# Allegro board wireless_plugmeter_v2_0.brd
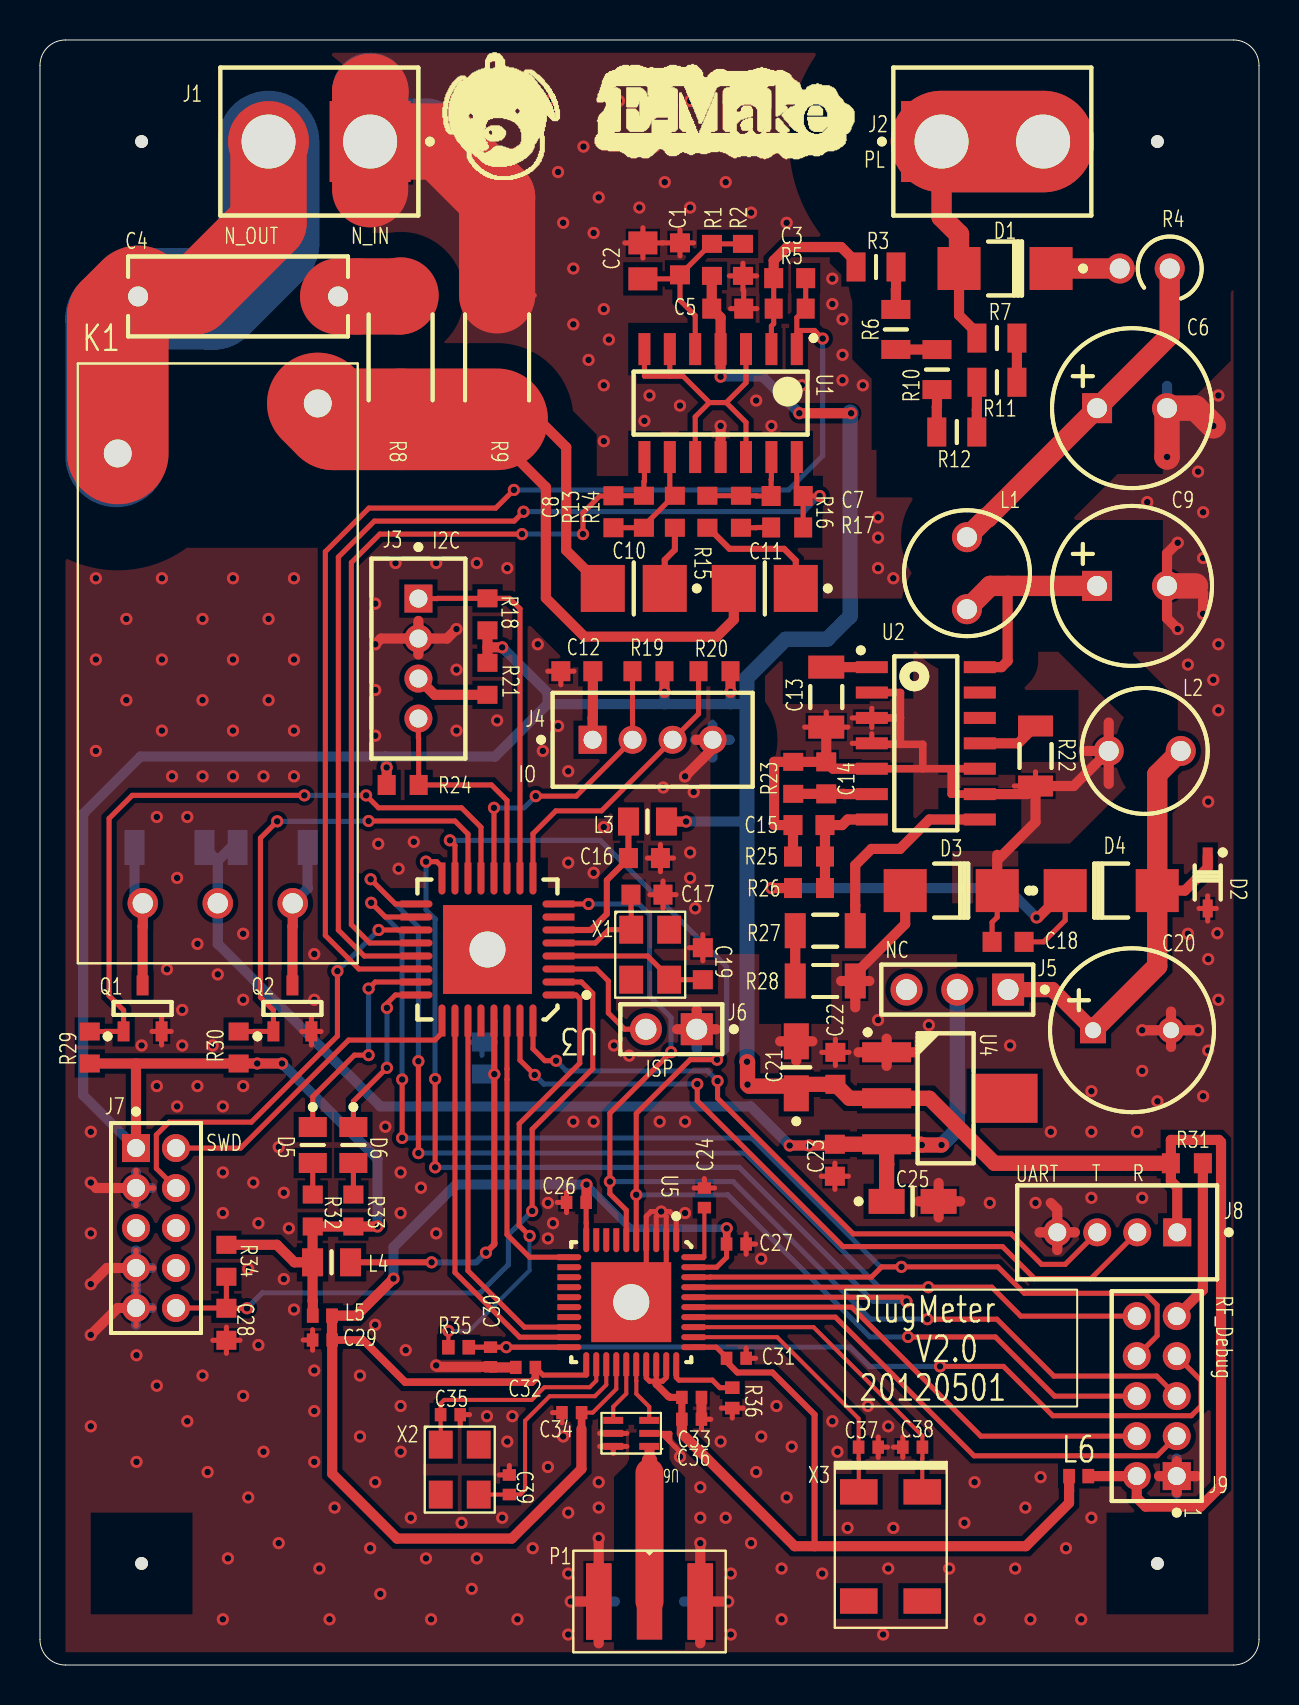
[diagram p0: board, top side]
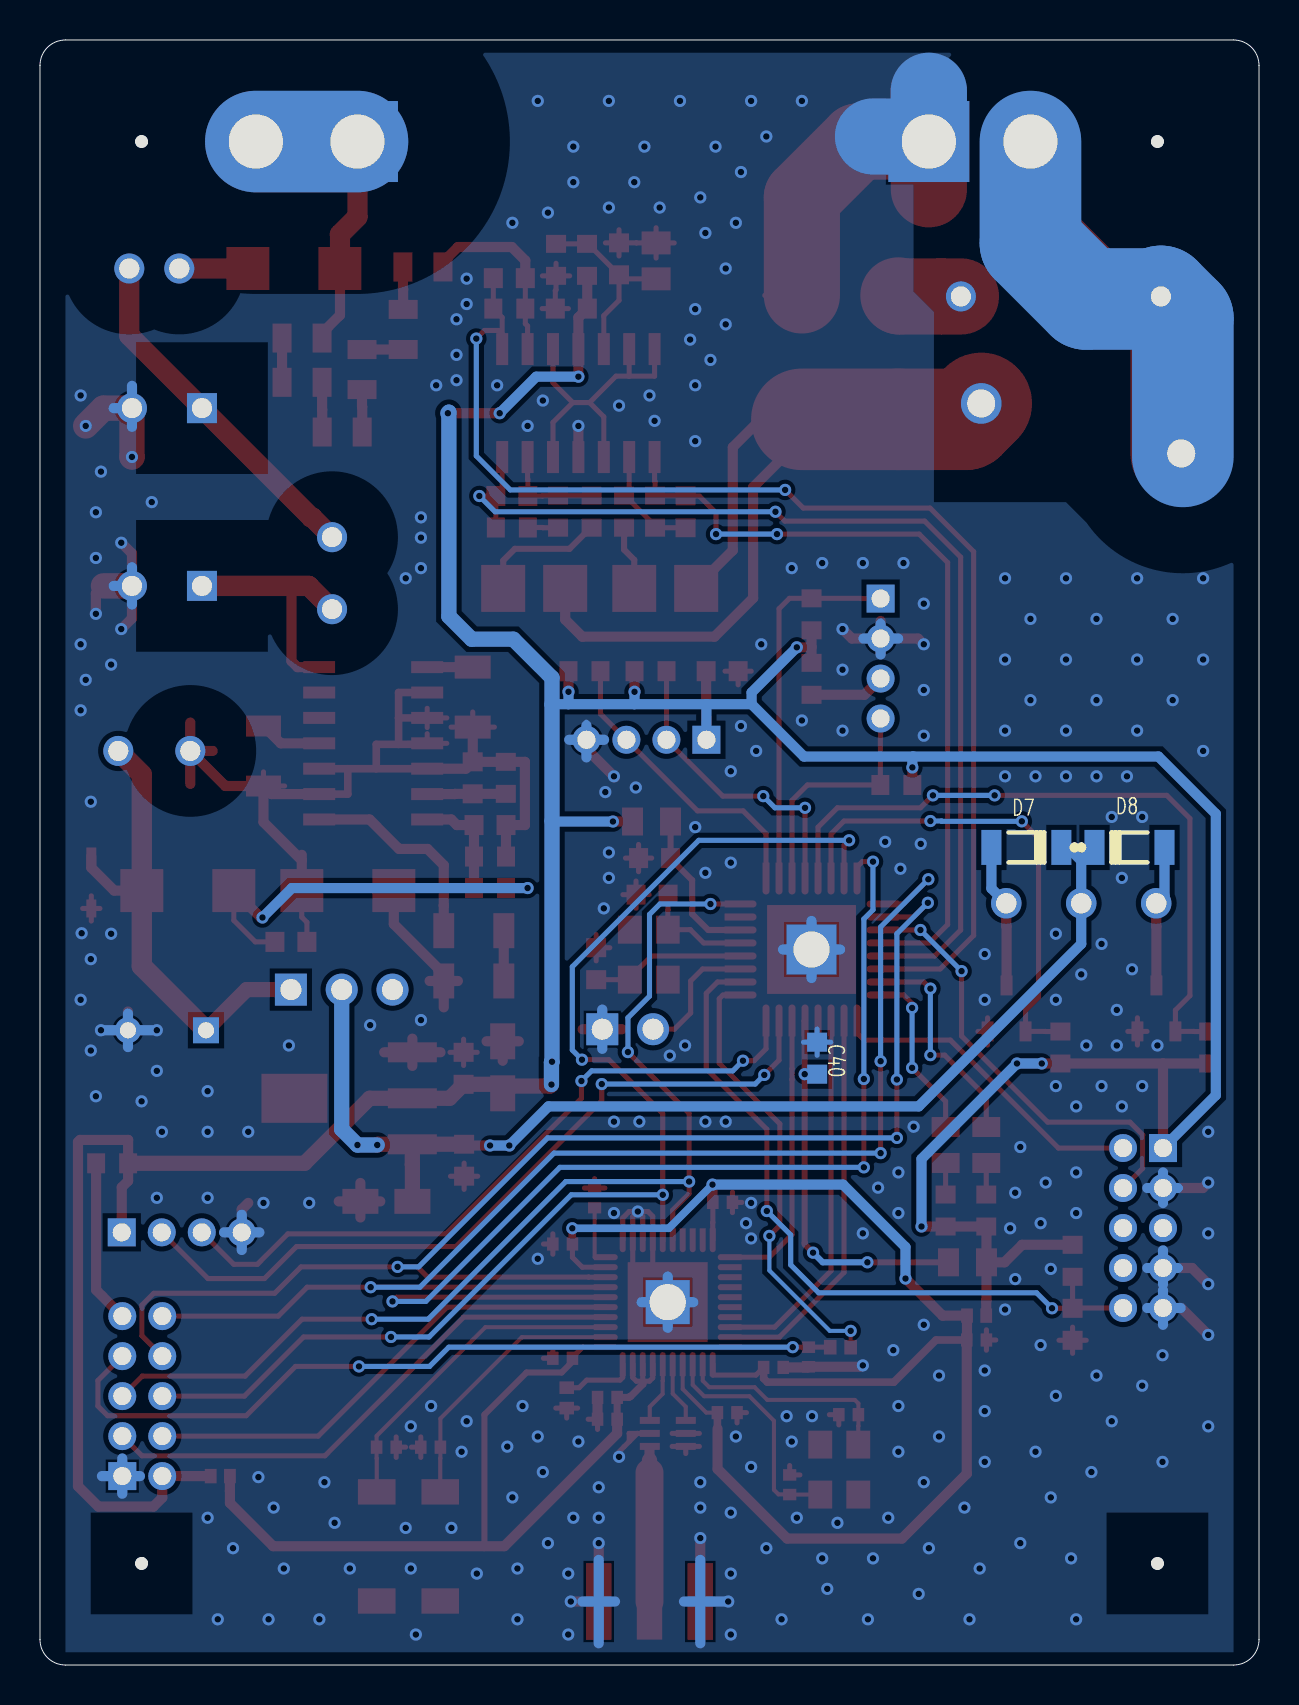
[diagram p1: board, bottom side, seen from below]

Outline 60.96 x 81.28 mm; copper layers: TOP, BOTTOM. Coordinates in mm from the lower left corner of the outline.
Outline path: 0,80.01 0,1.27 arc(0.37,0.37) 1.27,0 59.69,0 arc(60.59,0.37) 60.96,1.27 60.96,80.01 arc(60.59,80.91) 59.69,81.28 1.27,81.28 arc(0.37,80.91) 0,80.01

## Design rules (mm)
nets with their own width: min track width 0.254; nets +1V65 CC2530_DC CC2530_DD GND_POWER N110795 RF_SPI_CLK SWCLK
nets with their own width: min track width 0.508; nets +3V3 +5V

## Placement (name value [footprint] x y rotation side)
C1  C_220N_0603  [C_0603]  32 70.33 90 top
C2  C_10uU_6V3_0805  [C_0805]  30.15 70.23 90 top
C3  C_15N_0603  [C_0603]  37.49 69.37 0 top
C4  C_33N_400V_R1000  [CAP_R1000]  9.91 68.45 0 top
C5  C_220N_0603  [C_0603]  34.39 67.84 0 top
C6  C_2U2_450V_PR138  [CAPC_PR138]  54.61 62.87 0 top
C7  C_56P_0603  [C_0603]  37.36 58.47 0 top
C8  C_1N2_0603  [C_0603]  28.68 57.68 90 top
C9  C_2U2_450V_PR138  [CAPC_PR138]  54.61 53.98 0 top
C10  C_47U_10V_3538M  [CAPMP_3528M]  29.69 53.85 180 top
C11  C_47U_10V_3538M  [CAPMP_3528M]  36.25 53.85 180 top
C12  C_100N_0603  [C_0603]  26.85 49.71 180 top
C13  C_220N_50V_1206  [C_1206]  39.32 48.41 270 top
C14  C_330P_0603  [C_0603]  39.32 44.37 90 top
C15  C_5N6_50V_0603  [C_0603]  38.46 42.01 180 top
C16  C_220N_0603  [C_0603]  30.23 40.36 0 top
C17  C_12P_0603  [C_0603]  30.35 38.53 0 top
C18  C_100N_16V_0603  [C_0603]  48.41 36.17 180 top
C19  C_12P_0603  [C_0603]  33.15 35.08 90 top
C20  C_470U_6V3_PR390  [CAPC_PR390]  54.61 31.75 0 top
C21  C_10U_3216A  [CAPMP_3216A]  37.82 29.9 90 top
C22  C_220N_0603  [C_0603]  39.78 29.84 90 top
C23  C_220N_0603  [C_0603]  39.75 25.25 270 top
C24  C_1U_0402_X5R_K_6P3  [C_0402]  33.22 23.37 90 top
C25  C_10U_3216A  [CAPMP_3216A]  43.64 23.19 0 top
C26  C_100N_0402_X5R_K_10  [C_0402]  26.82 23.14 180 top
C27  C_1U_0402_X5R_K_6P3  [C_0402]  34.82 21.06 0 top
C28  C_220N_0603  [C_0603]  9.32 17.04 270 top
C29  C_2U2_0402_X5R_M_4VDC  [C_0402]  14.12 16.26 180 top
C30  C_1N_0402_NP0_J_50  [C_0402]  22.53 15.41 270 top
C31  C_100N_0402_X5R_K_10  [C_0402]  34.82 15.34 0 top
C32  C_100N_0402_X5R_K_10  [C_0402]  24.28 14.88 180 top
C33  C_100N_0402_X5R_K_10  [C_0402]  32.59 13.39 0 top
C34  C_100N_0402_X5R_K_10  [C_0402]  26.59 12.62 180 top
C35  C_27P_0402_NP0_J_50  [C_0402]  20.52 12.52 0 top
C36  C_220P_0402_NP0_J_50  [C_0402]  32.59 12.29 0 top
C37  C_15P_0402_NP0_J_50  [C_0402]  41.43 10.9 0 top
C38  C_15P_0402_NP0_J_50  [C_0402]  43.64 10.9 180 top
C39  C_27P_0402_NP0_J_50  [C_0402]  23.47 9.02 90 top
C40  C_220N_0603  [C_0603]  22.1 30.35 90 bottom
D1  D_S1M_SMA  [DO-214AC]  48.26 69.85 180 top
D2  BZX384C5V6  [SOD-323]  58.39 39.14 270 top
D3  D_FR1J_SMA  [DO-214AC]  45.57 38.73 180 top
D4  D_FR1J_SMA  [DO-214AC]  53.57 38.73 0 top
D5  LED_RED_0805  [LEDC_0805]  13.64 26.01 270 top
D6  LED_RED_0805  [LEDC_0805]  15.67 26.01 270 top
D7  D_1N4148_SOD80C  [SOD-80C]  11.63 40.89 0 bottom
D8  D_1N4148_SOD80C  [SOD-80C]  6.48 40.89 180 bottom
J1  NEUTRAL  [HDRV2_200]  16.51 76.2 180 top
J2  LIVE  [HDRV2_200]  45.09 76.2 0 top
J3  I2C  [HDRV4P200_1X4]  18.92 53.34 270 top
J4  I/O  [HDRV4P200_1X4]  27.64 46.28 0 top
J5  POWER_SEL  [HDRV3_100]  48.41 33.78 180 top
J6  ISP  [HDRV2_100]  32.84 31.8 180 top
J7  SWD  [HDRV10P200_2X5]  4.8 25.86 270 top
J8  UART  [HDRV4P200_1X4]  56.87 21.64 180 top
J9  RF_DEBUG  [HDRV10P200_2X5]  56.85 9.45 90 top
K1  HFE20-3/5-1HST-L2  [HFE20-3]  8.89 38.1 0 top
L1  L_1mH_22R105C  [IND_R360]  46.35 54.61 270 top
L2  L_1mH_22R105C  [IND_R360]  55.24 45.72 0 top
L3  600 Ohm 100MHz  [L_0805]  30.38 42.19 180 top
L4  600 Ohm 100MHz  [L_0805]  14.58 20.14 0 top
L5  L_BEAD_102_0402  [INDC_0402]  14.12 17.48 180 top
L6  L_BEAD_102_0402  [INDC_0402]  51.94 9.45 0 top
NOREF  -  []  -27.94 -73.66 0 top
NOREF#2  -  [unnamed#2]  55.88 76.2 0 top
NOREF#3  -  []  0 0 90 top
NOREF#4  -  []  0 0 0 top
NOREF#5  -  [unnamed#2]  55.88 5.08 0 top
NOREF#6  -  [unnamed#2]  5.08 76.2 0 top
NOREF#7  -  [unnamed#2]  5.08 5.08 0 top
P1  SMA_SIDE  [SMA_SMD_SIDE]  30.48 3.17 270 top
Q1  2N7002/SOT  [SOT-23]  5.13 32.84 90 top
Q2  2N7002/SOT  [SOT-23]  12.62 32.84 90 top
R1  R_22K_0603  [R_0603]  33.6 70.28 90 top
R2  R_22K_0603  [R_0603]  35.15 70.28 270 top
R3  R_270K_0805  [R_0805]  41.81 69.93 180 top
R4  R_220R_PTH  [R_ADV250]  55.24 69.85 0 top
R5  R_5K6_0603  [R_0603]  37.49 67.84 0 top
R6  R_270K_0805  [R_0805]  42.8 66.8 90 top
R7  R_270K_0805  [R_0805]  47.85 66.37 0 top
R8  R_100R_5%_2W_2512  [R_2512]  18.03 65.41 270 top
R9  R_5m_1%_2W_2512  [R_2512]  22.86 65.41 270 top
R10  R_270K_0805  [R_0805]  44.86 64.8 90 top
R11  R_270K_0805  [R_0805]  47.85 64.16 180 top
R12  R_270K_0805  [R_0805]  45.85 61.67 180 top
R13  R_68K_0603  [R_0603]  30.2 57.68 90 top
R14  R_4K7_0603  [R_0603]  31.75 57.68 90 top
R15  R_5K6_0603  [R_0603]  33.38 57.68 90 top
R16  R_1M2_0603  [R_0603]  35.05 57.68 270 top
R17  R_100K_0603  [R_0603]  37.36 56.9 0 top
R18  R_10K_0603  [R_0603]  22.38 52.55 90 top
R19  R_10K_0603  [R_0603]  30.43 49.71 180 top
R20  R_10K_0603  [R_0603]  33.73 49.71 180 top
R21  R_0R_0603  [R_0603]  22.38 49.33 270 top
R22  R_2R2_1206  [R_1206]  49.78 45.47 270 top
R23  R_7K5_0603  [R_0603]  37.67 44.37 90 top
R24  R_10K_0603  [R_0603]  18.14 44.02 0 top
R25  R_5K6_0603  [R_0603]  38.46 40.44 180 top
R26  R_5K1_0603  [R_0603]  38.46 38.86 0 top
R27  R_200K_1206  [R_1206]  39.27 36.73 180 top
R28  R_200K_1206  [R_1206]  39.27 34.21 0 top
R29  R_10K_0603  [R_0603]  2.49 30.89 270 top
R30  R_10K_0603  [R_0603]  9.93 30.89 270 top
R31  R_0R_0603  [R_0603]  57.35 25.1 180 top
R32  R_3K9_0603  [R_0603]  13.64 22.73 270 top
R33  R_3K9_0603  [R_0603]  15.67 22.73 270 top
R34  R_47K_0603  [R_0603]  9.32 20.22 270 top
R35  R_2K2_0402_G  [R_0402]  20.93 15.9 180 top
R36  R_56K_0402_F  [R_0402]  34.62 13.36 270 top
U1  NE5234D  [SO14]  34.04 63.12 270 top
U2  TEA152XT  [SO14]  44.3 46.1 0 top
U3  EM773FHN33  [HVQFN33M]  22.38 35.79 180 top
U4  AMS1117-3V3  [SOT-223M]  45.29 28.35 0 top
U5  CC2530  [S-PVQFN-M40]  29.57 18.15 270 top
U6  -  [2450BM15A0002]  30.47 10.93 180 top
X1  12MHz  [XTAL_SMD_3_2X2_5]  29.57 36.78 270 top
X2  X_32.000/10/15/30/16  [XTAL_SMD_3_2X2_5]  20.04 11.02 270 top
X3  X_32.768/20/50/40/12  [XTAL_SMD_85SMX]  40.94 8.66 0 top

## Library data of the parts
C1-C3 C5 C7 C8 = CAP NP: room: OPAMP
C4 = CAP NP: room: AC_RELAY
C6 C9 C20 C21 C25 = CAP POL: room: POWER
C10 C11 = CAP POL: room: OPAMP
C12 = CAP NP: room: EX_HEADER
C13-C15 C18 C22 C23 = CAP NP: room: POWER
C16 C17 C19 C40 = CAP NP: room: MCU
C24 C26 C27 C29-C39 = CAP NP
C28 = CAP NP: room: SWD
D1 D3 D4 = DIODE: room: POWER
D2 = DIODE BREAKDOWN: room: POWER
D5 D6 = LED: room: MCU
D7 D8 = DIODE: room: AC_RELAY
J1 J2 = HEADER 2
J3 = HEADER 4: room: MCU
J4 J8 = HEADER 4: room: EX_HEADER
J5 = HEADER 3: room: POWER
J6 = JUMPER
J7 J9 = HEADER 5X2
K1 = HFE20-3/5-1HST-L2
L1 L2 = INDUCTOR: room: POWER
L3 L4 = INDUCTOR: room: MCU
L5 L6 = INDUCTOR
P1 = SMA_SIDE
Q1 Q2 = 2N7002/SOT: room: AC_RELAY
R1 R2 R5 R13-R17 = R2: room: OPAMP
R3 R4 R6 R7 R10-R12 R22 R23 R25-R28 = R2: room: POWER
R8 R9 = R2: room: AC_RELAY
R18 R21 R24 R29 R30 R32 R33 = R2: room: MCU
R19 R20 = R2: room: EX_HEADER
R31 = R2: room: RF_DEBUG
R34 = R2: room: SWD
R35 R36 = R2
U1 = NE5234: room: OPAMP
U2 = TEA152XT: room: POWER
U3 = EM773FHN33: room: MCU
U4 = AMS1117-FIX: room: POWER
U5 = CC2530
U6 = 2450BM15A0002
X1 X2 = OSC_0
X3 = OSC_32.768K

## Footprints (pads in the part's own frame, mm; a bottom-side part is the same pattern mirrored in y, then rotated)
2450BM15A0002
  rect 1.001x0.351 smd: 1(0,0) 2(0,-0.65) 3(0,-1.3) 4(1.801,-1.3) 5(1.801,-0.65) 6(1.801,0)
C_0402
  rect 0.579x0.66 smd: 1(-0.49,0) 2(0.49,0)
C_0603
  rect 0.95x1.001 smd: 1(-0.8,0) 2(0.8,0)
C_0805
  rect 1.151x1.45 smd: 1(-0.899,0) 2(0.899,0)
C_1206
  rect 1.151x1.801 smd: 1(-1.501,0) 2(1.501,0)
CAP_R1000
  round 1.501 hole 1.001: 1(-5.001,0) 2(5.001,0)
CAPC_PR138
  rect 1.501x1.501 hole 1.001: 1(-1.75,0)
  round 1.501 hole 1.001: 2(1.75,0)
CAPC_PR390
  rect 1.3x1.3 hole 0.8: 1(-1.951,0)
  round 1.3 hole 0.8: 2(1.951,0)
CAPMP_3216A
  rect 1.801x1.25 smd: 1(-1.3,0) 2(1.3,0)
CAPMP_3528M
  rect 2.2x2.349 smd: 1(-1.549,0) 2(1.549,0)
DO-214AC
  rect 2.149x2.149 smd: A(2.301,0) C(-2.301,0)
HDRV2_100
  rect 1.6x1.6 hole 1.049: 1(0,0)
  round 1.6 hole 1.049: 2(2.54,0)
HDRV2_200
  rect 4.049x4.049 hole 2.7: 1(0,0)
  round 4.049 hole 2.7: 2(5.08,0)
HDRV3_100
  rect 1.6x1.6 hole 1.049: 1(0,0)
  round 1.6 hole 1.049: 2(2.54,0) 3(5.08,0)
HDRV4P200_1X4
  rect 1.4x1.4 hole 0.899: 1(0,0)
  round 1.4 hole 0.899: 2(1.999,0) 3(4,0) 4(5.999,0)
HDRV10P200_2X5
  rect 1.4x1.4 hole 0.899: 1(0,0)
  round 1.4 hole 0.899: 2(0,1.999) 3(1.999,0) 4(1.999,1.999) 5(4,0) 6(4,1.999) 7(5.999,0) 8(5.999,1.999) 9(8.001,0) 10(8.001,1.999)
HFE20-3
  round 1.524 hole 1.016: 1(3.749,0) 2(-3.749,0) 5(0,0)
  round 2.032 hole 1.397: 3(-5.001,22.499) 4(5.001,25.001)
HVQFN33M
  custom 1.6x0.351 smd: 1(-3.551,2.276) 2(-3.551,1.626) 3(-3.551,0.975) 4(-3.551,0.325) 5(-3.551,-0.325) 6(-3.551,-0.975) 7(-3.551,-1.626) 8(-3.551,-2.276) 17(3.551,-2.276) 18(3.551,-1.626) 19(3.551,-0.975) 20(3.551,-0.325) 21(3.551,0.325) 22(3.551,0.975) 23(3.551,1.626) 24(3.551,2.276)
  custom 0.351x1.6 smd: 9(-2.276,-3.551) 10(-1.626,-3.551) 11(-0.975,-3.551) 12(-0.325,-3.551) 13(0.325,-3.551) 14(0.975,-3.551) 15(1.626,-3.551) 16(2.276,-3.551) 25(2.276,3.551) 26(1.626,3.551) 27(0.975,3.551) 28(0.325,3.551) 29(-0.325,3.551) 30(-0.975,3.551) 31(-1.626,3.551) 32(-2.276,3.551)
  rect 4.445x4.445 hole 1.801: 33(0,0)
IND_R360
  round 1.501 hole 1.001: 1(-1.801,0) 2(1.801,0)
INDC_0402
  rect 0.589x0.719 smd: 1(-0.48,0) 2(0.48,0)
L_0805
  rect 1.049x1.4 smd: 1(-0.95,0) 2(0.95,0)
LEDC_0805
  rect 1.001x1.4 smd: A(0.899,0) C(-0.899,0)
R_0402
  rect 0.63x0.729 smd: 1(-0.511,0) 2(0.511,0)
R_0603
  rect 0.899x1.001 smd: 1(-0.8,0) 2(0.8,0)
R_0805
  rect 0.95x1.45 smd: 1(-1.001,0) 2(1.001,0)
R_1206
  rect 1.049x1.75 smd: 1(-1.501,0) 2(1.501,0)
R_2512
  rect 1.151x3.35 smd: 1(-3.099,0) 2(3.099,0)
R_ADV250
  round 1.501 hole 1.001: 1(-1.25,0) 2(1.25,0)
S-PVQFN-M40
  custom 1.199x0.3 smd: 1(-3.099,2.25) 2(-3.099,1.75) 3(-3.099,1.25) 4(-3.099,0.749) 5(-3.099,0.249) 6(-3.099,-0.249) 7(-3.099,-0.749) 8(-3.099,-1.25) 9(-3.099,-1.75) 10(-3.099,-2.25) 21(3.099,-2.25) 22(3.099,-1.75) 23(3.099,-1.25) 24(3.099,-0.749) 25(3.099,-0.249) 26(3.099,0.249) 27(3.099,0.749) 28(3.099,1.25) 29(3.099,1.75) 30(3.099,2.25)
  custom 0.3x1.199 smd: 11(-2.25,-3.099) 12(-1.75,-3.099) 13(-1.25,-3.099) 14(-0.749,-3.099) 15(-0.249,-3.099) 16(0.249,-3.099) 17(0.749,-3.099) 18(1.25,-3.099) 19(1.75,-3.099) 20(2.25,-3.099) 31(2.25,3.099) 32(1.75,3.099) 33(1.25,3.099) 34(0.749,3.099) 35(0.249,3.099) 36(-0.249,3.099) 37(-0.749,3.099) 38(-1.25,3.099) 39(-1.75,3.099) 40(-2.25,3.099)
  rect 4x4 hole 1.801: 41(0,0)
SMA_SMD_SIDE
  rect 3.81x1.27 smd: 1(0,0) 2(0,2.54) 3(0,2.54) 4(0,-2.54) 5(0,-2.54)
SO14
  rect 1.6x0.599 smd: 1(-2.7,3.81) 2(-2.7,2.54) 3(-2.7,1.27) 4(-2.7,0) 5(-2.7,-1.27) 6(-2.7,-2.54) 7(-2.7,-3.81) 8(2.7,-3.81) 9(2.7,-2.54) 10(2.7,-1.27) 11(2.7,0) 12(2.7,1.27) 13(2.7,2.54) 14(2.7,3.81)
SOD-80C
  rect 1.001x1.75 smd: A(1.75,0) C(-1.75,0)
SOD-323
  rect 0.899x0.5 smd: A(1.3,0) C(-1.3,0)
SOT-23
  rect 1.001x0.599 smd: 1(-1.151,0.95) 2(-1.151,-0.95) 3(1.151,0)
SOT-223M
  rect 2.451x1.001 smd: 1(-2.949,2.301) 2(-2.949,0) 3(-2.949,-2.301)
  rect 3.299x2.451 smd: 4(2.949,0)
unnamed#2
  round 0.635 hole 3.175 unplated: (0,0)
XTAL_SMD_3_2X2_5
  rect 1.397x1.194 smd: 1(0,0) 2(2.499,0) 3(2.499,1.9) 4(0,1.9)
XTAL_SMD_85SMX
  rect 1.88x1.27 smd: 1(0,0) 2(0,-5.461) 3(3.175,-5.461) 4(3.175,0)

## Nets
+1V65: C1.1 C2.1 R1.2 R2.1 U1.5(+IN)
+3V3: C5.1 C12.1 C21.1 C22.1 J4.1 J7.1 J8.1 J9.2 L3.1 L4.1 L5.2 L6.2 R1.1 R18.1 R19.1 R20.1 R21.1 R24.1 R29.2 R30.2 R31.2 R32.2 R33.2 R34.1 U1.4(VCC) U4.2(VOUT)
+5V: C23.1 C25.1 D7.C(K) D8.C(K) J5.2 K1.5(+) U4.3(VIN)
+5V_EXT: J5.3
GND_POWER: C1.2 C2.2 C5.2 C6.2 C9.2 C12.2 C16.2 C17.2 C19.2 C20.2 C21.2 C22.2 C23.2 C24.2 C25.2 C26.2 C27.2 C28.2 C29.2 C30.2 C31.2 C32.2 C33.2 C34.2 C35.2 C36.2 C37.2 C38.2 C39.2 C40.2 D2.A(ANODE) D3.A J1.1 J3.2 J4.4 J6.1 J7.3 J7.7 J7.9 J8.4 J9.1 P1.2(SHIELD#2) P1.3(SHIELD#3) P1.4(SHIELD#4) P1.5(SHIELD#5) Q1.2(SOURCE) Q2.2(SOURCE) R2.2 R9.1 R28.2 R36.2 U1.11(GND) U3.33(VSS) U4.1(GND) U5.1(DGND_USB) U5.2(USB_M) U5.3(USB_P) U5.4(DVDD_USB) U5.41(GND) U6.2(GND#2) U6.5(GND#5) U6.6(GND#6)
2: X1.2 X2.2 X3.2
3: X3.3
4: X1.4 X2.4
CC2530_DC: J9.3 U5.34(P2_2)
CC2530_DD: J9.4 U5.35(P2_1)
CC2530_RESET: R35.2 U3.1(PIO2_0/D\T\R\)
CFG0: U3.26(PIO1_4/CT32B1_MAT3/WAKEUP) U5.19(P0_0)
CFG1: U3.27(PIO1_11) U5.18(P0_1)
I_HIGHGAIN: C7.2 R17.2 U1.14(OUT) U3.21(I_HIGHGAIN)
I_LOWGAIN: C8.2 R13.2 U1.8(OUT) U3.20(I_LOWGAIN)
MRDY: U3.16(PIO0_7/C\T\S\) U5.36(P2_0)
N_OUTX: C4.1 J1.2 K1.3(P2)
OPAMPREF: U1.3(+IN) U1.6(-IN) U1.7(OUT) U1.10(+IN) U1.12(+IN)
PIO0_3: J4.3 R20.2 U3.9(PIO0_3)
PIO1_9: J4.2 R19.2 U3.12(PIO1_9)
PLUG_OFF: Q1.1(GATE) R29.1 U3.13(PIO3_4)
PLUG_ON: Q2.1(GATE) R30.1 U3.14(PIO3_5)
RF_SPI_CLK: J9.6 U3.15(PIO0_6/SCK0) U5.5(P1_5)
RF_SPI_CSN: J9.5 U3.8(PIO0_2/SSEL0/CT16B0_CAP0) U5.6(P1_4)
RF_SPI_MISO: J9.10 U3.17(PIO0_8/MISO0/CT16B0_MAT0) U5.37(P1_7)
RF_SPI_MOSI: J9.8 U3.18(PIO0_9/MOSI0/CT16B0_MAT1) U5.38(P1_6)
RST: C28.1 J7.10 R34.2 U3.2(R\E\S\E\T\/PIO0_0)
SCL: J3.1 R18.2 U3.10(PIO0_4/SCL)
SDA: J3.4 R24.2 U3.11(PIO0_5/SDA)
SRDY: U3.30(PIO1_5/R\T\S\/CT32B0_CAP0) U5.11(P1_0)
SWCLK: J7.4 U3.19(SWCLK/PIO0_10/SCK0/CT16B0_MAT2)
SWDIO: J7.2 U3.25(SWDIO/PIO1_3/CT32B1_MAT2)
UART_RX: J8.2 U3.31(PIO1_6/RXD/CT32B0_MAT0)
UART_TX: J8.3 U3.32(PIO1_7/TXD/CT32B0_MAT1)
VOLTAGE: C3.2 R5.2 U1.1(OUT) U3.22(VOLTAGE)
N79212: C26.1 C27.1 C29.1 C32.1 C34.1 L5.1 U5.10(DVDD) U5.21(AVDD5/AVDD_SOC) U5.24(AVDD3) U5.39(AVDD_DREG)
N79308: C31.1 C33.1 C36.1 L6.1 U5.27(AVDD2) U5.28(AVDD1) U5.29(AVDD4) U5.31(AVDD_GUARD)
N79444: U5.25(RF_P) U6.4(BAL2)
N79456: U5.26(RF_N) U6.3(BAL1)
N79468: P1.1(CENTER) U6.1(UNBAL)
N79766: R36.1 U5.30(RBIAS)
N79774: C24.1 U5.40(DCOUPL)
N80192: C39.1 U5.23(XOSC32M_Q2) X2.3
N80214: C35.1 U5.22(XOSC32M_Q1) X2.1
N80242: C38.1 U5.33(P2_3) X3.4
N80254: C37.1 U5.32(P2_4) X3.1
N80434: J9.9 R31.1
N80816: C30.1 J9.7 R35.1 U5.20(RESET_N)
N110687: D1.A J2.1 J2.2 R7.1
N110723: D1.C(K) R4.1
N110727: C6.1 L1.1 R4.2
N110775: C9.1 L1.2 U2.14(DRAIN)
N110783: R22.1 U2.11(SOURCE)
N110791: R27.1 U2.8(AUX)
N110795: C13.2 C14.2 C15.2 C18.2 D3.C(K) L2.1 R22.2 R23.2 R25.2 U2.2(GND#2) U2.3(GND#3) U2.4(GND#4) U2.5(GND#5) U2.9(GND#9) U2.10(GND#10)
N110827: C14.1 R23.1 U2.6(RC)
N110863: C13.1 U2.1(VCC)
N110911: C15.1 R25.1 R26.2 U2.7(REG)
N110951: C18.1 D4.C(K) R26.1
N111127: C20.1 D2.C(CATHODE) D4.A J5.1 L2.2
N112069: C3.1 R3.2 R5.1 U1.2(-IN)
N112191: D7.A K1.1(C1) Q2.3(DRAIN)
N112243: D8.A K1.2(C2) Q1.3(DRAIN)
N112413: C8.1 R13.1 R14.2 U1.9(-IN)
N112505: C7.1 R15.2 R16.1 U1.13(-IN)
N112735: C16.1 L3.2 U3.6(VDD_IO)
N112759: C10.2 C11.2 K1.4(P1) R8.2 R9.2
N112795: C10.1 R14.1
N112799: C11.1 R15.1
N112873: C19.1 U3.4(XTALIN) X1.3
N112983: C4.2 R8.1
N113301: C17.1 U3.5(XTALOUT) X1.1
N113357: C40.1 L4.2 U3.29(VDD_3V3)
N134846: J3.3 R21.2
N156238: D5.C(CATHODE) U3.23(R/PIO1_1/CT32B1_MAT0)
N156337: D6.C(CATHODE) U3.24(R/PIO1_2/CT32B1_MAT1)
N1176921: R7.2 R11.1
N1177441: R16.2 R17.1
N1180960: D5.A(ANODE) R32.1
N1183960: R3.1 R6.2
N1186440: R27.2 R28.1
N1190960: R11.2 R12.1
N1190961: R10.1 R12.2
N1192944: J6.2 U3.3(PIO0_1/CLKOUT/CT32B0_MAT2)
N1193960: R6.1 R10.2
N1563090: D6.A(ANODE) R33.1

Pads without a net: J7 5 6 8; U2 12 13; U3 7 28; U4 4; U5 7 8 9 12 13 14 15 16 17

## Via types
v1: diameter 0.61, hole 0.33, TOP to BOTTOM, 342 vias

## Routing (per net, layer and track width the routed paths; a pad name or vN(x,y) marks a point on that pad's centre or on a via; arc(x,y) is an arc through that point)
+1V65: length 9.8
  TOP w0.254: C1.1 32,68.26 32.77,67.5 U1.5 ; C1.1 31.8,69.33 C2.1 ; C1.1 33.55,71.08 R1.2 R2.1
+3V3: length 217.8
  TOP w0.508: R18.1 22.38,50.9 ; 22.38,50.9 v1(23.11,50.9) ; 22.38,50.9 R21.1 ; R34.1 11.85,21.02 12.72,20.14 L4.1 ; R20.1 v1(34.53,48.68) ; 4.8,30.09 R30.2 v1(10.86,30.09) v1(12.1,30.09) ; 4.8,30.09 R29.2 ; 4.8,30.09 J7.1 ; R1.1 33.59,69.47 C5.1 34.04,67.4 U1.4 v1(34.04,64.44) ; L6.2 J9.2 54.85,8.37 55.29,7.92 58.04,7.92 59.06,8.95 59.06,26.16 58.95,26.26 56.55,26.26 R31.2 56.55,24.21 56.87,23.9 J8.1 ; L5.2 13.64,18.22 13.63,18.23 L4.1 ; C12.1 27.65,47.37 27.64,47.36 J4.1 ; v1(16.88,21.93) R33.2 R32.2 13.63,21.92 L4.1 ; R24.1 v1(17.34,44.89) ; R19.1 v1(31.23,48.68) ; L3.1 v1(32.31,42.19) ; v1(37.97,62.61) v1(40.56,62.61)
  TOP w0.762: v1(35.36,30.18) 35.38,30.15 v1(35.38,29.03) 35.46,28.96 37.46,28.96 C21.1 38.27,29.04 C22.1 40.47,28.35 U4.2 44.48,28.35 47.73,25.1 R31.2
  BOTTOM w0.508: 34.54,48.06 31.24,48.06 ; 34.54,48.06 35.36,48.06 ; 34.54,48.06 34.53,48.07 v1(34.53,48.68) ; 31.24,48.06 27.64,48.06 ; 31.24,48.06 31.23,48.07 v1(31.23,48.68) ; 35.36,42.21 35.33,42.19 v1(32.31,42.19) ; v1(34.04,64.44) 36.14,64.44 v1(37.97,62.61) ; 27.64,48.06 J4.1 ; 27.64,48.06 25.37,48.06 ; J7.1 2.16,28.5 2.16,42.57 5.03,45.44 17.3,45.44 ; 17.3,45.44 22.76,45.44 25.37,48.06 ; 17.3,45.44 17.34,45.4 v1(17.34,44.89) ; 25.37,48.06 25.37,48.64 v1(23.11,50.9) ; v1(16.88,21.93) 16.88,25.31 v1(12.1,30.09) v1(10.86,30.09)
  BOTTOM w0.762: v1(40.56,62.61) 40.51,62.66 40.51,52.45 39.37,51.31 37.29,51.31 35.36,49.38 v1(35.36,30.18) 35.38,30.15 v1(35.38,29.03)
+5V: length 59.7
  TOP w0.508: C23.1 39.69,25.98 v1(38.46,25.98) v1(37.49,25.98)
  TOP w0.762: v1(45.09,26.01) v1(44.09,26.01) 44.06,26.05 U4.3 ; U4.3 42.34,26.05 C23.1 ; U4.3 42.34,25.04 42.34,25.03 C25.1 ; U4.3 42.35,26.04
  BOTTOM w0.508: 8.89,40.23 D8.C ; 8.89,40.23 K1.5 8.89,36.07 17.02,27.94 35.53,27.94 v1(37.49,25.98) v1(38.46,25.98) ; 8.89,40.23 9.55,40.89 D7.C
  BOTTOM w0.762: v1(44.09,26.01) v1(45.09,26.01) 45.87,26.8 J5.2
GND_POWER: length 250.6
  TOP w0.254: C24.2 33.22,24.33 ; C24.2 33.73,23.86 ; C24.2 32.71,23.86 ; 56.85,8.57 56.85,8.64 ; C16.2 31.03,41.04 ; C16.2 30.37,40.36 ; C16.2 31.03,39.68 ; C16.2 31.68,40.36 ; C29.2 13.63,16.77 ; C29.2 13.16,16.26 ; C29.2 13.63,15.75 ; C1.2 32.68,71.13 ; C1.2 31.13,71.13 31.13,71.13 C2.2 ; C1.2 32,70.48 ; C1.2 32,71.79 ; J7.9 5.68,17.86 ; J7.9 4.8,16.97 ; J7.9 4.8,18.74 ; 57.96,37.84 D2.A ; D2.A 58.83,37.84 ; D2.A 58.39,37.21 ; D2.A 58.39,38.47 ; 31.09,11.58 31.5,11.18 ; 31.09,11.58 31.49,11.58 31.5,11.58 31.5,11.18 ; 31.09,11.58 U6.2 ; 31.5,11.18 32.13,10.54 v1(32,10.41) ; Q2.2 14.05,31.69 ; Q2.2 13.57,31.01 ; Q2.2 13.57,32.37 ; Q2.2 13.09,31.69 ; R2.2 35.15,70.11 ; R2.2 35.15,68.78 35.19,68.74 C5.2 ; R2.2 34.47,69.48 ; R2.2 35.83,69.48 ; 21.48,12.52 C35.2 21.01,12.01 ; C22.2 39.78,31.3 ; C22.2 39.78,29.99 ; C22.2 40.46,30.65 ; C22.2 39.1,30.65 ; C19.2 33.15,36.53 ; C19.2 33.15,35.22 ; C19.2 32.47,35.88 ; J7.3 5.68,23.86 ; J7.3 4.8,22.98 ; J7.3 4.8,24.74 ; 26.33,22.63 C26.2 ; C26.2 26.33,23.65 ; C26.2 25.86,23.14 ; 30.32,18.9 U5.4 30.32,22.44 30.56,22.68 v1(31.06,22.68) ; 30.32,18.9 U5.41 ; 30.32,18.9 31.32,19.9 U5.2 31.32,22.43 v1(31.06,22.68) ; C38.2 43.15,11.41 ; C38.2 43.15,10.39 ; C38.2 42.68,10.9 ; 41.92,10.39 C37.2 ; C37.2 42.39,10.9 ; C37.2 41.92,11.41 ; v1(31.06,22.68) 30.82,22.44 U5.3 ; v1(31.06,22.68) 31.5,22.68 31.82,22.36 U5.1 ; 35.78,15.34 C31.2 35.31,15.85 ; 37.82,30.11 37.82,30.23 ; C17.2 31.15,39.21 ; C17.2 31.15,37.85 ; C17.2 31.81,38.53 ; C17.2 30.5,38.53 ; 25.63,12.62 C34.2 26.1,12.11 ; 26.05,49.03 C12.2 ; C12.2 25.39,49.71 ; C12.2 26.7,49.71 ; 27.99,10.93 U6.6 ; U6.6 29.35,10.93 ; U6.6 28.67,10.58 ; C28.2 10,16.24 ; C28.2 8.64,16.24 ; C28.2 9.32,16.9 ; C28.2 9.32,15.59 ; C2.2 29.24,71.13 ; C2.2 30.15,70.37 ; C2.2 30.15,71.89 ; 34.54,67.84 C5.2 ; C5.2 35.85,67.84 ; 33.08,11.78 C36.2 33.55,12.29 ; 23.47,9.98 C39.2 22.96,9.51 ; J7.7 4.8,20.74 ; J7.7 5.68,19.86 ; J7.7 4.8,18.98 ; C27.2 35.78,21.06 ; C27.2 35.31,21.57 ; C27.2 35.31,20.55 ; 39.07,24.45 C23.2 ; C23.2 39.75,25.1 ; C23.2 40.43,24.45 ; C23.2 39.75,23.79 ; 43.86,23.19 43.94,23.19 ; 29.35,11.58 U6.5 27.99,11.58 ; Q1.2 6.56,31.69 ; Q1.2 5.6,31.69 ; Q1.2 6.08,32.37 ; Q1.2 6.08,31.01 ; R36.2 35.17,12.85 ; R36.2 34.07,12.85 ; R36.2 34.62,12.35 ; 22.86,67.75 R9.1 24.72,68.5 ; 56.85,10.33 56.85,10.16 ; 18.92,50.46 18.92,50.55
  TOP w0.508: 57.78,53.98 58.17,53.59 v1(58.17,52.58) ; 37.82,30.23 C21.2 ; C21.2 37.02,31.2 ; C21.2 38.63,31.2 ; P1.2 v1(33.02,6.1) ; P1.2 v1(34.42,3.17) ; P1.2 33.02,1.09 ; 32.82,46.28 J4.4 33.63,45.83 v1(32.26,44.45) 32.21,44.4 ; 56.85,8.64 J9.1 ; J9.1 56.85,10.16 ; J9.1 55.96,9.45 ; J9.1 57.86,9.45 ; J3.2 20.35,51.34 v1(20.83,51.82) ; J3.2 18.92,50.55 ; J3.2 18.92,52.22 ; J3.2 17.05,51.34 v1(16.76,51.05) ; R28.2 40.77,34.56 43.27,37.06 D3.A ; R28.2 40.77,32.9 ; R28.2 40.06,34.21 ; R28.2 41.48,34.21 ; U4.1 42.34,31.33 ; U4.1 42.34,29.97 ; U4.1 40.93,30.65 ; U4.1 43.75,30.65 ; C20.2 56.56,30.92 ; C20.2 v1(57.91,31.75) ; C20.2 56.56,32.68 ; C20.2 v1(55.12,31.75) ; J8.4 50.87,20.76 ; J8.4 49.99,21.64 ; J8.4 50.87,22.79 50.55,23.11 ; J8.4 51.75,21.64 ; v1(56.9,56.13) 56.36,55.6 C9.2 56.36,52.35 v1(56.9,51.82) ; v1(26.54,3.17) P1.4 ; P1.4 27.94,1.09 ; P1.4 v1(27.94,6.35) ; U1.11 v1(34.04,61.98) ; J6.1 31.86,31.8 ; J6.1 33.82,31.8 ; J6.1 32.84,32.78 ; C25.2 44.94,22.39 ; C25.2 46.02,23.19 ; C25.2 43.94,23.19 ; C25.2 44.94,24.11 ; J7.9 3.89,17.86 v1(2.54,16.51) ; J7.7 3.35,19.86 v1(2.54,19.05) ; C33.2 C36.2 ; C32.2 22.56,14.88 C30.2 19.88,14.92 v1(19.81,14.99) ; J7.3 2.81,23.86 v1(2.54,24.13)
  TOP w1.27: v1(56.36,60.43) 56.36,60.43 C6.2 57.78,62.87 v1(58.67,61.98) ; C9.2 57.78,53.98
  TOP w2.54: 20.07,76.2 20.83,76.2
  TOP w3.81: R9.1 22.86,73.41 20.07,76.2 J1.1 ; J1.1 16.51,78.66 16.54,78.69 ; J1.1 16.51,73.81
  BOTTOM w0.254: 34.49,46.28 34.52,46.28 ; 4.8,22.98 4.8,23.11 ; 4.8,24.74 4.8,24.64 ; 22.1,30.5 C40.2 ; C40.2 21.42,31.15 ; C40.2 22.1,31.81 ; C40.2 22.78,31.15 ; 3.92,23.86 4.06,23.86 ; 3.92,19.86 4.06,19.86 ; 57.28,62.87 57.29,62.87 ; 57.28,53.98 57.29,53.98 ; 18.92,50.46 18.92,50.55 ; 5.68,19.86 5.59,19.86 ; 18.92,52.22 18.92,52.07 ; 4.8,18.98 4.8,19.05 ; 5.68,23.86 5.59,23.86 ; 33.63,47.16 33.63,46.99 ; 5.68,17.86 5.59,17.86 ; 19.78,51.34 19.8,51.34
  BOTTOM w0.508: 4.06,23.86 J7.3 ; J7.3 5.59,23.86 ; J7.3 4.8,23.11 ; J7.3 4.8,24.64 ; 5.59,19.86 J7.7 ; J7.7 4.06,19.86 ; J7.7 4.8,20.74 ; J7.7 4.8,19.05 ; C9.2 56.36,53.04 ; C9.2 57.28,53.98 ; C9.2 56.36,54.91 ; C6.2 57.28,62.87 ; C6.2 56.36,63.98 ; C6.2 56.36,61.93 ; U5.41 29.57,16.87 ; U5.41 28.29,18.15 ; U5.41 29.57,19.43 ; U5.41 30.87,18.15 ; J8.4 51.75,21.64 ; J8.4 49.99,21.64 ; J8.4 50.87,20.76 ; J8.4 50.87,22.52 ; P1.2 32.2,3.17 ; P1.2 33.84,3.17 ; P1.2 33.02,5.26 ; P1.2 33.02,1.09 ; 18.92,52.07 J3.2 ; J3.2 19.78,51.34 ; J3.2 18.92,50.55 ; J3.2 18.04,51.34 ; J4.4 33.63,45.4 ; J4.4 32.75,46.28 ; J4.4 34.49,46.28 ; J4.4 33.63,46.99 ; P1.4 27.94,1.09 ; P1.4 28.76,3.17 ; P1.4 v1(26.54,3.17) ; P1.4 27.94,5.26 ; J7.9 3.92,17.86 ; J7.9 4.8,17.02 ; J7.9 4.8,18.74 ; J7.9 5.59,17.86 ; v1(57.91,31.75) C20.2 ; C20.2 56.56,32.58 ; C20.2 55.37,31.75 ; C20.2 56.56,30.91 ; J9.1 56.85,10.33 ; J9.1 55.96,9.45 ; J9.1 56.85,8.57 ; J9.1 57.86,9.45 ; U3.33 22.38,37.22 ; U3.33 22.38,34.36 ; U3.33 23.81,35.79 ; U3.33 20.95,35.79 ; 32.84,30.82 J6.1 32.84,32.78
  BOTTOM w3.81: J1.1 16.51,78.74 ; 16.76,76.45 19.3,76.45
  vias: v1(2.54,26.67) v1(2.54,21.59) v1(2.54,11.94) v1(2.79,54.36) v1(2.79,50.29) v1(2.79,45.72) v1(4.32,52.32) v1(4.32,48.26) v1(4.83,15.49) v1(4.83,10.16) v1(5.08,30.99) v1(5.84,42.42) v1(5.84,28.96) v1(5.84,13.97) v1(6.1,54.36) v1(6.1,50.29) v1(6.1,46.74) v1(6.35,34.8) v1(6.6,44.45) v1(6.86,39.37) v1(6.86,27.94) v1(7.11,32.77) v1(7.11,30.99) v1(7.37,42.42) v1(7.37,12.19) v1(7.87,36.07) v1(7.87,28.96) v1(8.13,52.32) v1(8.13,48.26) v1(8.13,44.45) v1(8.13,14.48) v1(8.38,9.65) v1(8.64,30.99) v1(8.89,34.54) v1(9.14,27.94) v1(9.14,24.64) v1(9.14,22.61) v1(9.14,2.29) v1(9.4,5.33) v1(9.65,54.36) v1(9.65,50.29) v1(9.65,46.74) v1(9.65,44.45) v1(10.16,36.58) v1(10.16,33.27) v1(10.16,28.96) v1(10.16,13.46) v1(10.41,19.81) v1(10.41,8.38) v1(10.67,24.13) v1(10.92,22.1) v1(10.92,16) v1(11.18,44.45) v1(11.18,10.67) v1(11.43,52.32) v1(11.43,48.26) v1(11.94,25.91) v1(11.94,6.1) v1(12.19,23.62) v1(12.19,19.3) v1(12.45,21.84) v1(12.7,54.36) v1(12.7,50.29) v1(12.7,46.74) v1(12.7,44.45) v1(12.7,17.78) v1(13.72,35.56) v1(13.72,33.27) v1(13.72,14.73) v1(13.72,12.7) v1(13.72,10.16) v1(13.97,4.83) v1(14.48,2.29) v1(14.73,7.87) v1(16,14.48) v1(16,11.43) v1(16.51,5.84) v1(16.76,53.09) v1(16.76,48.77) v1(16.76,46.48) v1(16.76,17.02) v1(16.76,9.14) v1(16.92,41.07) v1(17.02,3.56) v1(17.27,26.92) v1(17.78,55.12) v1(17.93,39.83) v1(18.03,24.64) v1(18.03,22.61) v1(18.03,12.95) v1(18.03,10.67) v1(18.29,15.75) v1(18.54,7.37) v1(18.69,41.17) v1(19.05,23.88) v1(19.3,5.33) v1(19.56,2.29) v1(19.81,55.12) v1(19.81,21.59) v1(20.83,49.78) v1(20.83,46.74) v1(21.08,7.11) v1(21.59,3.81) v1(21.84,55.12) v1(21.84,5.33) v1(22.35,12.45) v1(22.86,78.23) v1(22.86,47.24) v1(23.11,7.37) v1(23.37,54.86) v1(23.37,11.18) v1(23.62,12.45) v1(23.88,2.29) v1(24.64,76.45) v1(24.64,5.84) v1(24.89,51.05) v1(25.15,45.72) v1(25.4,78.23) v1(25.4,23.11) v1(25.4,21.34) v1(25.4,9.91) v1(25.65,22.1) v1(25.91,74.68) v1(25.91,46.96) v1(26.16,72.14) v1(26.16,11.43) v1(26.42,44.7) v1(26.42,40.13) v1(26.42,7.62) v1(26.42,4.57) v1(26.42,1.52) v1(26.67,69.85) v1(26.67,67.06) v1(26.67,27.18) v1(27.18,75.95) v1(27.43,65.28) v1(27.69,71.63) v1(27.69,39.62) v1(27.69,27.18) v1(27.94,73.41) v1(27.94,9.14) v1(27.94,7.87) v1(28.19,67.82) v1(28.19,64.01) v1(28.19,61.21) v1(28.19,41.91) v1(28.45,66.29) v1(28.7,30.99) v1(28.96,78.23) v1(29.46,30.48) v1(29.97,72.9) v1(30.23,62.23) v1(30.48,63.5) v1(30.73,75.95) v1(30.99,27.18) v1(31.24,74.17) v1(31.17,43.89) v1(32,62.99) v1(32.26,27.18) v1(32.26,22.61) v1(32.51,78.23) v1(32.51,72.9) v1(32.51,40.64) v1(32.51,39.37) v1(32.69,43.66) v1(32.77,37.85) v1(33.02,8.89) v1(33.02,7.37) v1(34.04,11.18) v1(34.29,75.95) v1(34.29,74.17) v1(34.29,7.37) v1(34.54,4.57) v1(34.54,1.52) v1(35.56,72.64) v1(35.56,6.1) v1(35.81,63.25) v1(35.81,9.65) v1(36.07,78.23) v1(36.07,20.32) v1(36.07,11.43) v1(36.58,61.98) v1(36.83,12.95) v1(37.08,4.83) v1(37.08,2.29) v1(37.34,72.14) v1(37.34,8.38) v1(37.59,10.92) v1(38.1,64.01) v1(39.12,4.57) v1(39.62,69.34) v1(39.62,68.07) v1(39.62,12.19) v1(39.88,10.67) v1(40.13,67.31) v1(40.13,65.53) v1(40.13,64.26) v1(40.39,6.86) v1(41.15,64.01) v1(41.4,12.95) v1(41.91,57.4) v1(41.91,56.39) v1(41.91,54.86) v1(41.91,32.26) v1(42.16,1.52) v1(42.42,11.94) v1(42.42,4.83) v1(42.67,54.36) v1(42.67,6.86) v1(44.45,32) v1(45.47,4.83) v1(46.23,7.11) v1(46.74,9.14) v1(46.99,2.29) v1(47.5,23.11) v1(48.51,30.99) v1(48.77,4.83) v1(49.28,7.87) v1(49.53,2.29) v1(49.78,23.11) v1(50.04,9.4) v1(50.55,26.67) v1(51.31,5.84) v1(52.07,2.29) v1(52.58,28.7) v1(52.58,26.67) v1(52.58,23.37) v1(52.58,7.37) v1(54.86,26.67) v1(55.12,29.72) v1(55.12,23.37) v1(55.37,58.17) v1(55.88,28.19) v1(57.4,50.04) v1(57.4,36.58) v1(57.91,59.69) v1(58.17,57.66) v1(58.17,55.37) v1(58.17,28.45) v1(58.42,43.18) v1(58.42,35.31) v1(58.42,30.73) v1(58.67,49.28) v1(58.93,63.5) v1(58.93,51.05) v1(58.93,47.75) v1(58.88,36.6) v1(58.93,33.27)
CC2530_DC: length 27.5
  TOP w0.254: 32.67,17.4 39.78,17.4 46.71,10.46 55.86,10.46 J9.3
CC2530_DD: length 24.9
  TOP w0.254: J9.4 47.05,11.45 40.6,17.9 U5.35
CC2530_RESET: length 22.3
  TOP w0.203: v1(20.42,16.71) R35.2
  TOP w0.254: v1(24.49,21.46) 23.96,21.99 23.96,27.07 26.99,30.1 26.99,33.32 26.8,33.51 U3.1
  BOTTOM w0.203: v1(20.42,16.71) 21.46,16.71 24.49,19.74 v1(24.49,21.46)
CFG0: length 19.7
  TOP w0.254: U3.26 20.75,19.63 23.99,16.4 U5.19
CFG1: length 18.8
  TOP w0.254: U3.27 21.4,19.72 24.22,16.9 U5.18
I_HIGHGAIN: length 52.9
  TOP w0.254: C7.2 37.85,58.79 U1.14 ; C7.2 v1(38.99,58.47) ; C7.2 R17.2 ; U3.21 16.22,35.46 14.92,36.76 14.92,55.42 16.72,57.22 23.71,57.22 v1(24.18,57.68)
  BOTTOM w0.254: v1(38.99,58.47) 38.2,57.68 v1(24.18,57.68)
I_LOWGAIN: length 40.3
  TOP w0.254: v1(24.1,56.57) 16.99,56.57 15.57,55.14 15.57,37.03 16.49,36.11 U3.20 ; v1(27.15,56.57) 27.15,57.63 27.99,58.47 28.66,58.47 C8.2 R13.2 30.2,59.19 30.23,59.21 U1.8
  BOTTOM w0.254: v1(24.1,56.57) v1(27.15,56.57)
MRDY: length 54.1
  TOP w0.254: v1(19.76,29.31) v1(19.76,24.89) ; U3.16 20.1,39.92 19.84,40.18 v1(19.3,40.18) ; U5.36 43.12,18.4 v1(43.33,18.19)
  BOTTOM w0.254: v1(43.33,18.19) 41.67,18.19 34.96,24.89 v1(19.76,24.89) ; v1(19.76,29.31) 19.76,37.31 19.3,37.77 v1(19.3,40.18)
N_OUTX: length 41.7
  TOP w3.81: C4.1 7.74,68.45 11.43,72.14 J1.2
  TOP w5.08: C4.1 3.89,67.44 K1.3
  BOTTOM w5.08: J1.2 11.43,71.12 8.64,68.33 5.03,68.33 C4.1 3.81,67.36 3.81,60.45
OPAMPREF: length 16.6
  TOP w0.254: 33.48,63.14 32.16,64.47 31.5,64.47 ; 33.48,63.14 34.32,63.14 ; 33.48,63.14 32.77,62.43 U1.10 ; U1.12 35.31,62.15 34.32,63.14 ; 31.5,64.47 30.23,64.47 U1.7 ; 31.5,64.47 U1.6 ; 34.32,63.14 35.31,64.14 U1.3
PIO0_3: length 15.1
  TOP w0.254: U3.9 24.65,41.58 25.8,42.72 28.08,42.72 J4.3 32.93,47.57 R20.2
PIO1_9: length 15.3
  TOP w0.254: v1(24.79,43.46) 26.81,43.46 J4.2 29.63,47.23 29.63,47.24 R19.2 ; U3.12 v1(22.7,42.88)
  BOTTOM w0.254: v1(22.7,42.88) 24.21,42.88 v1(24.79,43.46)
PLUG_OFF: length 34.9
  TOP w0.254: v1(16.31,43.5) 16.93,42.88 21.08,42.88 22.05,41.9 U3.13 ; R29.1 3.24,31.69 3.25,31.69 Q1.1 4.18,32.75 3.45,33.48 3.45,42.34 4.61,43.5 v1(13.22,43.5)
  BOTTOM w0.254: v1(13.22,43.5) v1(16.31,43.5)
PLUG_ON: length 24.9
  TOP w0.254: U3.14 21.4,41.56 20.75,42.21 v1(16.43,42.21) ; R30.1 10.69,31.69 10.69,31.69 Q2.1 11.67,32.75 11.02,33.4 11.02,41.36 v1(11.86,42.2)
  BOTTOM w0.254: v1(11.86,42.2) 15.86,42.2 15.88,42.21 v1(16.43,42.21)
RF_SPI_CLK: length 64
  TOP w0.254: v1(20.5,41.25) 20.75,41 U3.15 ; v1(33.86,30.28) 32.51,30.28 29.82,27.58 v1(29.82,23.52) U5.5 ; J9.6 50.74,13.45 47.78,16.41 v1(43.41,16.41)
  BOTTOM w0.254: v1(20.5,41.25) 28.02,41.25 34.34,34.92 34.34,30.76 v1(33.86,30.28) ; v1(29.82,23.52) 34.39,23.52 41.5,16.41 v1(43.41,16.41)
RF_SPI_CSN: length 55.9
  TOP w0.254: J9.5 55.84,14.45 50.7,14.45 47.85,17.3 v1(44.37,17.3) ; U5.6 29.32,22.75 28.5,23.57 v1(28.5,24.18) 28.5,27.6 v1(31.56,30.66) ; U3.8 v1(27.43,38.06)
  BOTTOM w0.254: v1(31.56,30.66) 31.56,32.37 30.48,33.45 30.48,37.54 29.96,38.06 v1(27.43,38.06) ; v1(44.37,17.3) 41.55,17.3 34.67,24.18 v1(28.5,24.18)
RF_SPI_MISO: length 68.5
  TOP w0.254: U3.17 17.77,38.06 v1(16.54,39.3) ; U5.37 v1(44.42,18.9) 47.6,18.9 49.05,17.45 J9.10 ; v1(18.92,30.2) v1(18.92,25.6)
  BOTTOM w0.254: v1(18.92,30.2) 18.92,36.91 v1(16.54,39.3) ; v1(18.92,25.6) 35.26,25.6 41.96,18.9 v1(44.42,18.9)
RF_SPI_MOSI: length 69.8
  TOP w0.254: U3.18 17.27,37.41 v1(16.56,38.13) ; J9.8 55.86,16.47 55.86,18 55.27,18.59 49.23,18.59 47.9,19.91 v1(43.08,19.91) 42.09,19.91 41.58,19.41 33.53,19.41 33.52,19.4 U5.38 ; v1(18.11,29.29) v1(18.11,26.37)
  BOTTOM w0.254: v1(43.08,19.91) 42.03,19.91 35.57,26.37 v1(18.11,26.37) ; v1(18.11,29.29) 18.11,36.58 v1(16.56,38.13)
RST: length 36.4
  TOP w0.254: C28.1 9.31,17.86 J7.10 ; C28.1 R34.2 ; C28.1 v1(10.35,17.84) ; U3.2 27.08,34.16 27.64,33.6 27.64,29.83 24.61,26.8 v1(24.61,22.71)
  BOTTOM w0.254: v1(10.35,17.84) 11.13,18.62 22.02,18.62 23.42,20.02 23.42,21.51 v1(24.61,22.71)
SCL: length 18.8
  TOP w0.254: J3.1 19.88,53.34 19.89,53.35 R18.2 23.48,53.35 24,52.83 U3.10
SDA: length 12
  TOP w0.254: J3.4 18.92,46.39 18.94,46.37 R24.2 22.58,44.02 23.35,43.25 U3.11
SRDY: length 14.3
  TOP w0.254: U3.30 23.35,29.82 23.36,29.82 23.36,29.29 23.35,29.29 23.35,21.53 24.48,20.4 U5.11
SWCLK: length 22.2
  TOP w0.254: v1(14.87,34.71) 14.87,31.46 10.57,27.15 6.45,27.15 5.82,26.52 5.82,24.84 J7.4 ; U3.19 v1(16.93,36.76)
  BOTTOM w0.254: v1(16.93,36.76) v1(14.87,34.71)
SWDIO: length 16.3
  TOP w0.254: J7.2 10.03,25.86 15.43,31.26 19.75,31.26 20.1,31.61 U3.25
UART_RX: length 38.8
  TOP w0.254: U3.31 24,30.25 v1(24.74,29.51) ; v1(32.87,29.06) 32.87,28.22 40.16,20.93 48.13,20.93 49.73,19.33 52.56,19.33 J8.2
  BOTTOM w0.254: v1(32.87,29.06) 25.2,29.06 v1(24.74,29.51)
UART_TX: length 35.3
  TOP w0.254: v1(33.88,29.21) 33.88,28.35 40.67,21.56 48.56,21.56 50.09,20.04 51.27,20.04 J8.3 ; v1(25.81,30.23) 25.25,30.23 24.65,30.82 U3.32
  BOTTOM w0.254: v1(25.81,30.23) 26.31,29.72 33.38,29.72 v1(33.88,29.21)
VOLTAGE: length 62.4
  TOP w0.254: 37.85,66.57 38.02,66.75 38.73,66.75 v1(39.14,66.34) ; 37.85,66.57 37.85,67.4 R5.2 C3.2 ; 37.85,66.57 U1.1 ; U3.22 15.95,34.81 14.27,36.49 14.27,55.69 16.45,57.87 22.79,57.87 v1(23.7,58.78)
  BOTTOM w0.254: v1(39.14,66.34) 39.14,60.48 37.44,58.78 v1(23.7,58.78)
N79212: length 74.8
  TOP w0.203: U5.24 28.82,13.8 27.64,12.62 C34.1
  TOP w0.254: C32.1 25.15,14.5 27.32,14.5 U5.21 ; C26.1 27.31,22.13 27.32,22.13 U5.10 ; U5.39 33.84,19.9 34.33,20.39 C27.1
  TOP w0.381: C27.1 34.34,21.06 v1(34.34,21.84) ; C32.1 24.77,14.33 24.59,14.15 18.26,14.15 16.15,16.26 C29.1 ; C34.1 27.08,11.82 27.08,11.81
  TOP w0.508: 27.08,11.81 27.08,9.8 23.6,6.32 17.86,6.32 14.61,9.57 C29.1 14.6,16.27 L5.1 15.82,17.48 v1(17.68,19.33) ; C26.1 27.33,23.16 v1(27.33,24.03)
  BOTTOM w0.381: v1(27.33,24.03) 29.51,21.84 v1(34.34,21.84)
  BOTTOM w0.508: v1(17.68,19.33) 17.68,20.9 20.8,24.03 v1(27.33,24.03)
N79308: length 45
  TOP w0.254: U5.29 31.32,14.38 31.14,14.2 30.81,14.2 ; U5.28 30.82,14.2 30.81,14.2 ; 30.81,14.2 30.48,14.2 30.32,14.36 U5.27 ; U5.31 33.82,15.9 34.33,15.38 C31.1
  TOP w0.305: 38.73,5.94 38.73,12.52 36.63,14.63 34.87,14.63 34.33,15.17 C31.1
  TOP w0.356: C36.1 C33.1 31.5,13.39 31.45,13.44 31.42,13.44 30.81,14.05 30.81,14.2
  TOP w0.508: C36.1 32.1,11.58 37.74,5.94 49.3,5.94 51.46,8.1 51.46,8.7 51.46,8.71 L6.1
N79444: length 3.1
  TOP w0.203: U5.25 29.32,13.57 28.67,12.92 U6.4
N79456: length 3.1
  TOP w0.203: U5.26 29.82,14.22 29.82,14.22 29.82,13.56 30.47,12.92 U6.3
N79468: length 7.8
  TOP w0.203: 30.48,10.85 30.47,10.86 U6.1
  TOP w0.508: 30.48,10.85 30.48,10.24
  TOP w0.762: 30.48,10.24 30.48,9.63
  TOP w1.397: 30.48,9.63 P1.1
N79766: length 3.7
  TOP w0.254: R36.1 34,13.87 33.62,14.25 31.95,14.25 31.82,14.38 U5.30
N79774: length 3
  TOP w0.203: C24.1 33.22,20.4 U5.40
N80192: length 11.7
  TOP w0.203: U5.23 28.32,14.01 27.75,13.44 25.48,13.44 24.26,12.22 24.26,8.76 24.03,8.53 23.48,8.53 C39.1 21.94,8.53 X2.3
N80214: length 11.1
  TOP w0.203: U5.22 27.82,14.22 27.49,13.89 25.22,13.89 24.59,13.26 20.21,13.26 20.03,13.08 C35.1 20.03,11.96 20.04,11.95 X2.1
N80242: length 16.5
  TOP w0.203: X3.4 44.12,10.33 44.13,10.34 C38.1 44.13,11.46 38.68,16.9 U5.33
N80254: length 13.6
  TOP w0.203: X3.1 40.94,10.33 40.94,10.34 C37.1 40.94,12.33 36.87,16.4 U5.32
N80434: length 8.2
  TOP w0.508: J9.9 58.15,18.76 R31.1
N80816: length 44.4
  TOP w0.254: J9.7 58.06,14.23 58.06,12.95 57.58,12.47 50.65,12.47 48.18,14.94 v1(45.01,14.94) ; U5.20 v1(23.32,15.9) C30.1 21.45,15.9 R35.1
  BOTTOM w0.254: v1(23.32,15.9) 40.52,15.9 41.48,14.94 v1(45.01,14.94)
N110687: length 20.7
  TOP w0.508: D1.A 45.96,67.52 46.85,66.62 R7.1
  TOP w1.016: D1.A 45.96,71.56 45.09,72.43 J2.1
  TOP w5.08: J2.1 J2.2
  BOTTOM w5.08: J2.2 J2.1
N110723: length 3.4
  TOP w1.016: R4.1 D1.C
N110727: length 17.7
  TOP w1.016: L1.1 47.34,57.39 47.39,57.39 C6.1 56.49,66.5 R4.2
N110775: length 12.3
  TOP w0.508: 48.41,53.98 48.39,53.95 48.39,50.22 48.08,49.91 U2.14
  TOP w1.016: C9.1 47.52,53.98 L1.2
N110783: length 3.1
  TOP w0.508: R22.1 48.92,46.1 U2.11
N110791: length 10.5
  TOP w0.508: R27.1 40.77,37.99 40.77,37.99 40.77,40.01 41.58,40.82 43,40.82 44.48,42.29 U2.8
N110795: length 59.4
  TOP w0.254: C18.2 47.61,37.15 47.87,37.41 D3.C ; 38.24,46.91 C13.2 ; C13.2 39.32,47.67 ; C13.2 40.4,46.91 ; 41.6,46.89 U2.3 ; U2.3 40.62,47.37 ; U2.3 41.6,47.85 ; 48.73,43.96 R22.2 49.78,44.67 ; 40.62,46.1 U2.4 ; U2.4 42.58,46.1 ; U2.4 41.6,46.58
  TOP w0.381: 44.15,44.83 44.15,46.05 43.03,46.05 ; 44.15,44.83 45.57,44.83 ; 44.15,44.83 41.6,44.83 ; 45.57,44.83 45.57,43.56 U2.9 ; 45.57,44.83 47,44.83 ; 43.03,47.37 43.03,48.64 U2.2 ; 43.03,47.37 U2.3 ; 43.03,47.37 43.03,46.05 ; 43.03,46.05 41.6,46.05 U2.4
  TOP w0.508: 41.6,44.83 39.66,44.83 C14.2 ; 53.44,47.14 L2.1 ; L2.1 53.44,44.07 ; L2.1 51.69,43.96 R22.2 ; L2.1 52.32,45.72 ; R22.2 49.78,42.16 47.87,40.25 ; R22.2 49.38,43.56 U2.9 ; C14.2 R23.2 36.71,45.17 36.71,42.01 C15.2 R25.2 ; C14.2 C13.2 ; 47.87,40.52 47.87,40.25 ; 47.87,40.25 D3.C
N110827: length 3.9
  TOP w0.508: R23.1 C14.1 40.2,43.57 40.21,43.56 U2.6
N110863: length 2.3
  TOP w0.508: C13.1 39.32,49.91 U2.1
N110911: length 5.6
  TOP w0.508: R26.2 R25.1 C15.1 40.11,42.01 40.39,42.29 U2.7
N110951: length 20.9
  TOP w0.254: C18.1 50.19,36.17 51.27,37.25 D4.C
  TOP w0.508: v1(49.83,37.39) 49.92,37.39 D4.C ; R26.1 v1(36.58,38.86)
  BOTTOM w0.508: v1(36.58,38.86) 48.36,38.86 v1(49.83,37.39)
N111127: length 24.4
  TOP w0.508: D4.A 57.25,38.73 58.39,39.88 D2.C
  TOP w0.762: C20.1 50.63,33.78 J5.1
  TOP w1.016: L2.2 55.87,44.54 D4.A 55.87,34.96 C20.1
N112069: length 9.4
  TOP w0.254: U1.2 36.58,66.97 36.69,67.09 R5.1 C3.1
  TOP w0.508: C3.1 36.69,70.25 37.37,70.92 40.06,70.92 40.81,70.18 R3.2
N112191: length 7.2
  TOP w0.508: Q2.3 12.62,36.94 12.64,36.96 K1.1
  BOTTOM w0.508: D7.A 13.38,38.84 K1.1
N112243: length 7.1
  TOP w0.508: K1.2 5.14,36.96 5.13,36.95 Q1.3
  BOTTOM w0.508: K1.2 4.73,38.51 D8.A
N112413: length 5.8
  TOP w0.254: U1.9 31.5,58.74 R14.2 31.7,58.48 30.2,56.98 R13.1 C8.1
N112505: length 5.1
  TOP w0.254: R15.2 R16.1 35.82,58.48 35.83,58.47 C7.1 36.56,59.3 36.58,59.31 U1.13
N112735: length 7.8
  TOP w0.305: U3.6 27.54,36.76 28.35,37.57 28.35,39.26 29.43,40.34 C16.1 29.43,42.19 L3.2
N112759: length 43.2
  TOP w0.508: C11.2 34.7,52.29 33.84,51.44 27.23,51.44 25.3,53.37 25.3,58.91 22.86,61.35 R9.2 24.92,62.31 26.31,60.91 26.31,55.75 28.14,53.92 C10.2
  TOP w5.08: K1.4 14.69,62.31 R8.2 R9.2
N112795: length 3.2
  TOP w0.305: R14.1 31.75,55.79 31.24,55.28 C10.1
N112799: length 6.5
  TOP w0.254: 33.43,56.88 R15.1
  TOP w0.305: C11.1 37.8,55.24 37.21,55.83 34.48,55.83 33.43,56.88
N112873: length 7.8
  TOP w0.254: U3.4 30.38,35.46 31.47,34.38 X1.3 33.14,34.28 C19.1
N112983: length 5.3
  TOP w0.203: 15.89,68.45 15.94,68.5 R8.1
  TOP w3.81: C4.2 17.98,68.45 R8.1
N113301: length 5.7
  TOP w0.254: U3.5 27.77,36.11 28.44,36.78 X1.1 29.57,37.76 29.55,37.78 C17.1
N113357: length 19.4
  TOP w0.305: v1(19.58,20.14) L4.2 ; U3.29 22.72,32.22 v1(22.72,29.55) 22.72,21.12 22.72,21.12 22.72,21.04 v1(22.3,20.62)
  BOTTOM w0.254: C40.1 v1(22.72,29.55)
  BOTTOM w0.305: v1(22.3,20.62) 21.82,20.14 v1(19.58,20.14)
N134846: length 3.8
  TOP w0.508: R21.2 19.74,48.53 J3.3
N156238: length 11
  TOP w0.254: U3.23 16.76,34.16 v1(16.43,33.83) ; v1(16.43,30.51) 15.72,30.51 13.64,28.42 D5.C
  BOTTOM w0.254: v1(16.43,33.83) v1(16.43,30.51)
N156337: length 8.5
  TOP w0.254: v1(17.35,32.87) 17.35,33.09 17.77,33.51 U3.24 ; v1(17.35,29.87) 15.67,28.19 D6.C
  BOTTOM w0.254: v1(17.35,32.87) v1(17.35,29.87)
N1176921: length 2.2
  TOP w0.508: R7.2 R11.1
N1177441: length 1.5
  TOP w0.254: R16.2 35.81,56.88 35.82,56.9 R17.1
N1180960: length 1.6
  TOP w0.254: D5.A R32.1
N1183960: length 2.1
  TOP w0.508: R3.1 42.81,68.82 42.8,68.81 R6.2
N1186440: length 2.5
  TOP w0.508: R27.2 R28.1
N1190960: length 2.5
  TOP w0.508: R11.2 46.85,62.78 46.85,62.78 R12.1
N1190961: length 2.1
  TOP w0.508: R12.2 44.85,62.93 44.86,62.94 R10.1
N1192944: length 6.6
  TOP w0.254: U3.3 27.82,34.81 28.42,34.21 28.42,32.61 29.24,31.8 J6.2
N1193960: length 2.1
  TOP w0.508: R6.1 42.8,65.8 R10.2
N1563090: length 1.6
  TOP w0.254: D6.A R33.1

## Copper pours and planes (outline as drawn; the poured copper is in the pictures)
GND_POWER on TOP: 1.27,0.64 1.27,80.64 59.69,80.64 59.69,0.64 ; 38 cut-outs
GND_POWER on BOTTOM: 1.27,0.64 1.27,80.64 59.69,80.64 59.69,0.64 ; 7 cut-outs
N110795 on TOP: 37.59,50.8 50.8,50.8 54.36,47.24 54.36,43.94 48.51,38.1 36.07,38.1 36.07,49.28 ; 1 cut-out

## Text on the board
Ref Des/Silkscreen Top: SWD | N_OUT | N_IN | I2C | IO | ISP | PL | NC | UART | T | R | 1 | RF_Debug | PlugMeter | 20120501 | V2.0
PLACE_BOUND_TOP: FIGURE | SIZE | 13.0 | 31.5 | 35.4 | 39.4 | 40.0 | 41.3 | 55.0 | 70.9 | 106.3 | 125.0 | DRILL CHART: TOP to BOTTOM | ALL UNITS ARE IN MILS | PLATED | NON-PLATED | QTY | 342 | 2 | 32 | 12 | 3 | 5 | 4
